# Altium PCB UV_LED.PcbDoc
Units mm, origin at the board's own origin, x right, y up, seen from the top; angles counter-clockwise.
Board outline 26.29 x 14.99 mm, 2 copper layers (Top Layer, Bottom Layer); 7 components, 5 nets, 32 pads, 0 vias.
Unrouted connection lines stored in the file: 8.
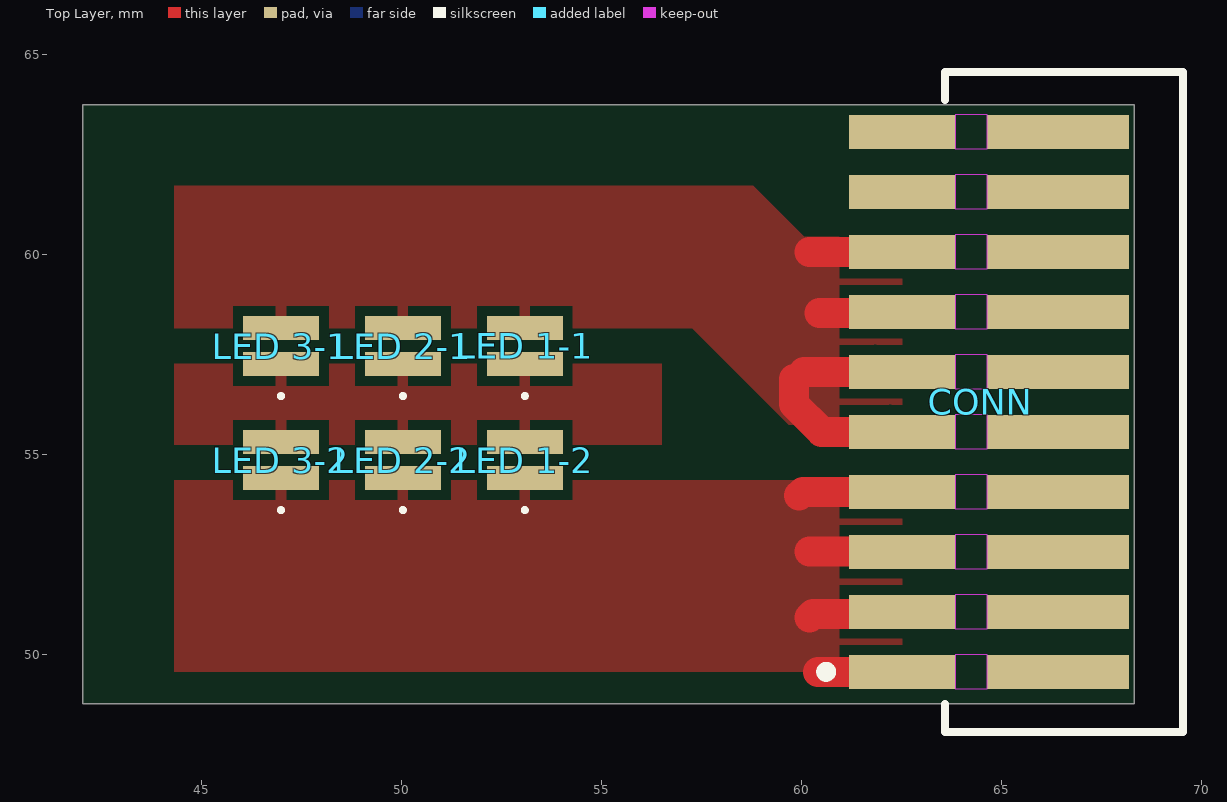
[diagram p0: Top Layer view]
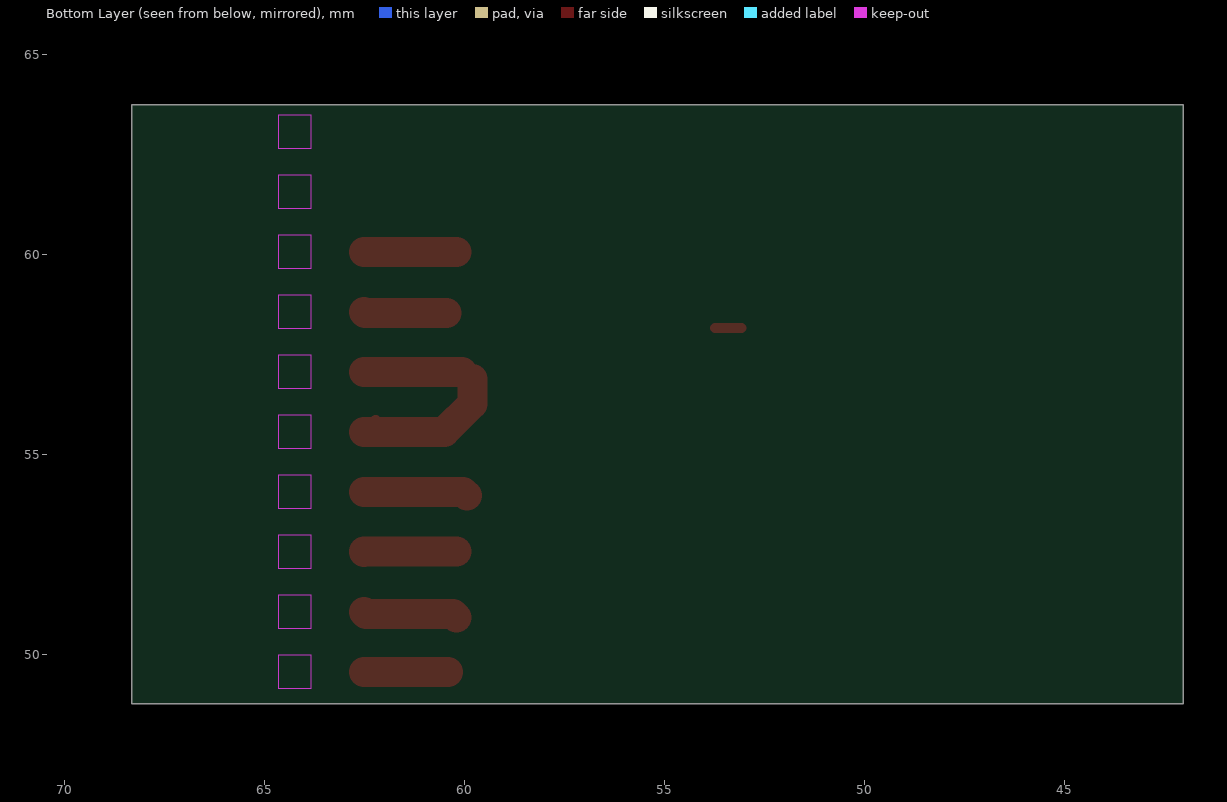
[diagram p1: Bottom Layer view, seen from below]
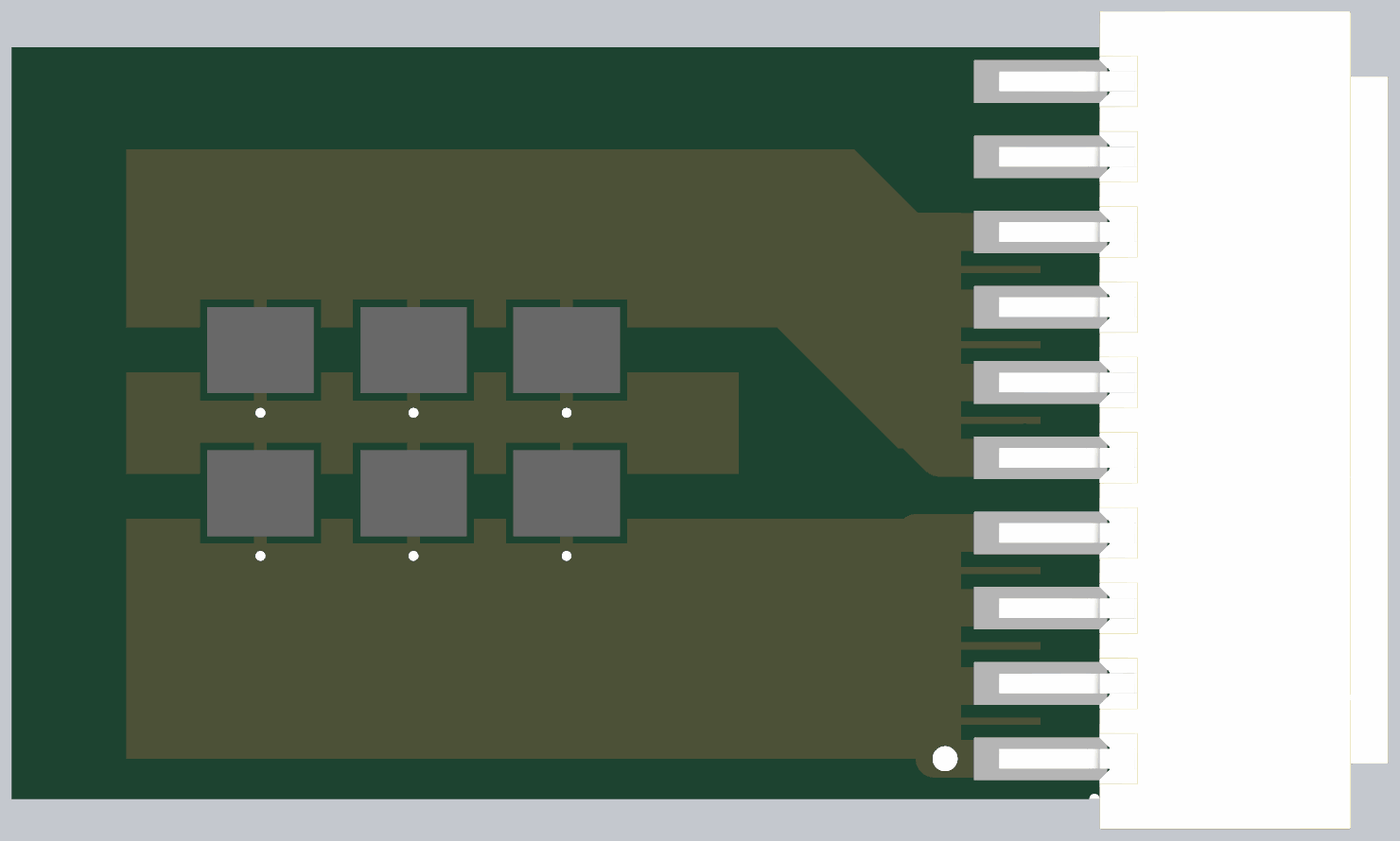
[diagram p2: 3D render of the assembled board from above, using the file's embedded part models]

## Layer stack, top to bottom
Top Solder: solder mask 0.0102, Solder Resist, Dk 3.5
Top Layer: signal copper 0.0356
Dielectric 1: dielectric 0.32, FR-4, Dk 4.8
Bottom Layer: signal copper 0.0356
Bottom Solder: solder mask 0.0102, Solder Resist, Dk 3.5

## Board outline
42.037,48.768 68.326,48.768 68.326,63.754 42.037,63.754

## Design rules (kind name [scope] priority, off if disabled: settings)
Clearance [All] p1: gap=0 ignorepadtopadclearanceinfootprint=TRUE
PolygonConnect [All] p1: connectstyle=Relief reliefconductorwidth=0.254 reliefentries=4 polygonreliefangle="90 Angle" airgapwidth=0.254
RoutingVias [All] p1: holewidth=0.711 width=1.27 viastyle="Through Hole" minholewidth=0.711 minwidth=1.27 maxholewidth=0.711 maxwidth=1.27
SolderMaskExpansion [All] p1: expansion=0.102 istentingtop=FALSE
UnpouredPolygon [All] p1: allowunpoured=TRUE allowshelved=TRUE
Width [All] p1: maxlimit=0.75 minlimit=0.254 preferedwidth=0.75 toplayer_minwidth=0 minimp=50.000000 maximp=50.000000 favimp=50.000000
29 further rules are at their usual default settings.

## Components (designator, comment, footprint, x,y, rotation, side; value= is the part's Value field where it differs from the comment)
CONN "87438-1043" FP-87438-1043-MFG 66.571,56.321 r90 top
"LED 1-1" "1A 3.2V" L1F3U380100004001 53.086,57.716 r90 top
"LED 1-2" "1A 3.2V" L1F3U380100004001 53.086,54.864 r90 top
"LED 2-1" "1A 3.2V" L1F3U380100004001 50.038,57.716 r90 top
"LED 2-2" "1A 3.2V" L1F3U380100004001 50.038,54.864 r90 top
"LED 3-1" "1A 3.2V" L1F3U380100004001 46.99,57.716 r90 top
"LED 3-2" "1A 3.2V" L1F3U380100004001 46.99,54.864 r90 top

## Footprints (in the part's own frame and the unit in brackets; to place one, negate y for a bottom-side part, rotate by r counter-clockwise, add the part's x,y. Pads: shape width x height; smd on the part's side, far side on the other; paste and mask are expansions set on the pad)
FP-87438-1043-MFG [mm]
  rect 0.85x3.55 smd paste+0 mask+0: 1(-6.75,0.15) 2(-5.25,0.15) 3(-3.75,0.15) 4(-2.25,0.15) 5(-0.75,0.15) 6(0.75,0.15) 7(2.25,0.15) 8(3.75,0.15) 9(5.25,0.15) 10(6.75,0.15)
  rect 0.85x2.65 smd paste+0 mask+0: 1(-6.75,4.05) 2(-5.25,4.05) 3(-3.75,4.05) 4(-2.25,4.05) 5(-0.75,4.05) 6(0.75,4.05) 7(2.25,4.05) 8(3.75,4.05) 9(5.25,4.05) 10(6.75,4.05)
  Keep-Out Layer region: -7.175,1.925 -6.325,1.925 -6.325,2.725 -7.175,2.725
  Keep-Out Layer region: -5.675,1.925 -4.825,1.925 -4.825,2.725 -5.675,2.725
  Keep-Out Layer region: -4.175,1.925 -3.325,1.925 -3.325,2.725 -4.175,2.725
  Keep-Out Layer region: -2.675,1.925 -1.825,1.925 -1.825,2.725 -2.675,2.725
  Keep-Out Layer region: -1.175,1.925 -0.325,1.925 -0.325,2.725 -1.175,2.725
  Keep-Out Layer region: 0.325,1.925 1.175,1.925 1.175,2.725 0.325,2.725
  Keep-Out Layer region: 1.825,1.925 2.675,1.925 2.675,2.725 1.825,2.725
  Keep-Out Layer region: 3.325,1.925 4.175,1.925 4.175,2.725 3.325,2.725
  Keep-Out Layer region: 4.825,1.925 5.675,1.925 5.675,2.725 4.825,2.725
  Keep-Out Layer region: 6.325,1.925 7.175,1.925 7.175,2.725 6.325,2.725
  silkscreen extent -8.25,-2.98 8.25,6.07, body extent -8.35,-3.08 8.35,5.48, height 0.25
L1F3U380100004001 [mm]
  rect 0.6x1.9 smd: 1(-0.45,0) 2(0.45,0)
  silkscreen extent -1.3,-0.05 -1.2,0.05, body extent -0.86,-1.06 0.86,1.06, height 0.76

## Part data
CONN: library part CMP-04776-000584-1, "CONN HEADER SMD R/A 10POS 1.5MM", Color=Natural, Contact Resistance=40mR, Current Rating=2.5A, Flammability Rating="UL94 V-0", Housing Color=Beige, Insulation Resistance=1GR, Max Operating Temperature=105°C, Max Voltage Rating (AC)=350V, Min Operating Temperature=-55°C, Package Quantity=6000, Voltage Rating=250V, Contact Material=Brass, Contact Plating=Tin, Gender=Male, Glow Wire Compliant=Non-compliant, Housing Material=Thermoplastic, Lead Free="Contains Lead", Lead Pitch=1.5mm, Material=Nylon, Mating Cycles=10, Mount="Surface Mount", Number of Circuits=10, Number of Contacts=10, Number of Positions=10, Number of Rows=1, Orientation="Right Angle", Packaging="Tape and Reel", Pitch=1.5mm, Radiation Hardening=No, RoHS Compliant=Yes, Series=Pico-SPOX, Termination=SMD/SMT, Voltage Rating (AC)=350V, Voltage Rating (DC)=350V
"LED 1-1" "LED 1-2" "LED 2-1" "LED 2-2" "LED 3-1" "LED 3-2": library part L1F3-U380100004001, "LED", Manufacturer_Name=Lumileds, Mouser Part Number=997-L1F3U38010401, Arrow Part Number=L1F3-U380100004001, Arrow Price/Stock=https://www.arrow.com/en/products/l1f3-u380100004001/lumileds?region=nac, Datasheet Link=https://componentsearchengine.com/Datasheets/1/L1F3-U380100004001.pdf, Height=0.66mm, Manufacturer_Part_Number=L1F3-U380100004001, Mouser Price/Stock=https://www.mouser.co.uk/ProductDetail/Lumileds/L1F3-U380100004001?qs=T3oQrply3y9xGBCGNIciEw%3D%3D

## Nets (pads, with @x,y where several pads share a name; then routed paths per layer and width w, separated by ;. In a path a pad name is that pad's centre, name@x,y a point inside that pad or via, vN(x,y) a via of type N, cw(c..) or ccw(c..) an arc to the next point about the centre after c; other vN are vias at no path point)
LED+: "LED 1-1.2" "LED 2-1.2" "LED 3-1.2" CONN.5 CONN.6 CONN.7 CONN.8 | length 11.5
  Top Layer w0.254: 53.086,58.166 53.736,58.166 ; CONN.5@62.223,55.869 CONN.5@62.521,55.571
  Top Layer w0.75: 59.81,56.889 59.81,56.268 60.507,55.571 CONN.5@62.521,55.571 ; 60.068,57.071 CONN.6@62.521,57.071 ; 60.198,60.071 CONN.8@62.521,60.071 ; 60.452,58.547 62.497,58.547 CONN.7@62.521,58.571
LED-: "LED 1-2.1" "LED 2-2.1" "LED 3-2.1" CONN.1 CONN.2 CONN.3 CONN.4 | length 9.4
  Top Layer w0.75: 59.944,53.975 60.04,54.071 CONN.4@62.521,54.071 ; 60.198,50.927 60.292,51.021 62.471,51.021 CONN.2@62.521,51.071 ; 60.198,52.578 62.514,52.578 CONN.3@62.521,52.571 ; 60.411,49.571 CONN.1@62.521,49.571
"NetLED 1-1_1": 
"NetLED 2-1_1": "LED 1-1.1" "LED 1-2.2" "LED 2-1.1" "LED 2-2.2" "LED 3-1.1" "LED 3-2.2"
"NetLED 3-1_1": 
pads on no net: CONN.9 CONN.10

## Polygon pours and split planes (outlines as drawn)
LED- on Top Layer "LED-_L01_P002" (solid, pour order 2): 44.323,54.356 59.944,54.356 64.008,54.356 64.008,49.571 44.323,49.571
LED+ on Top Layer "LED+_L01_P000" (solid, pour order 0): 60.071,60.452 58.801,61.722 44.323,61.722 44.323,58.166 57.277,58.166 59.69,55.753 62.339,55.753 62.521,55.571 62.521,60.071 62.521,55.571 62.521,60.452
"NetLED 2-1_1" on Top Layer "NETLED_2-1_1_L01_P001" (solid, pour order 1): 44.323,57.277 56.515,57.277 56.515,55.245 44.323,55.245